# EAGLE board 4hp proto (EAGLE 9.2.2)
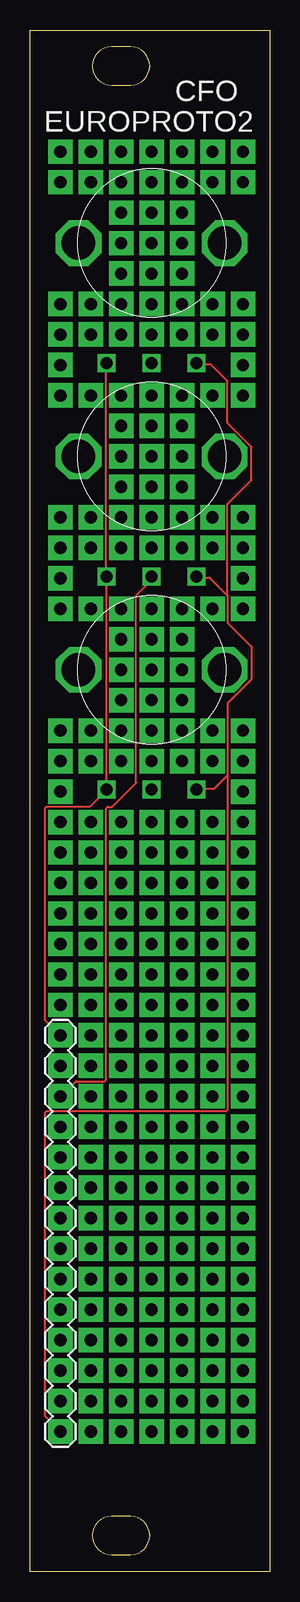
[diagram p0: board, top side]
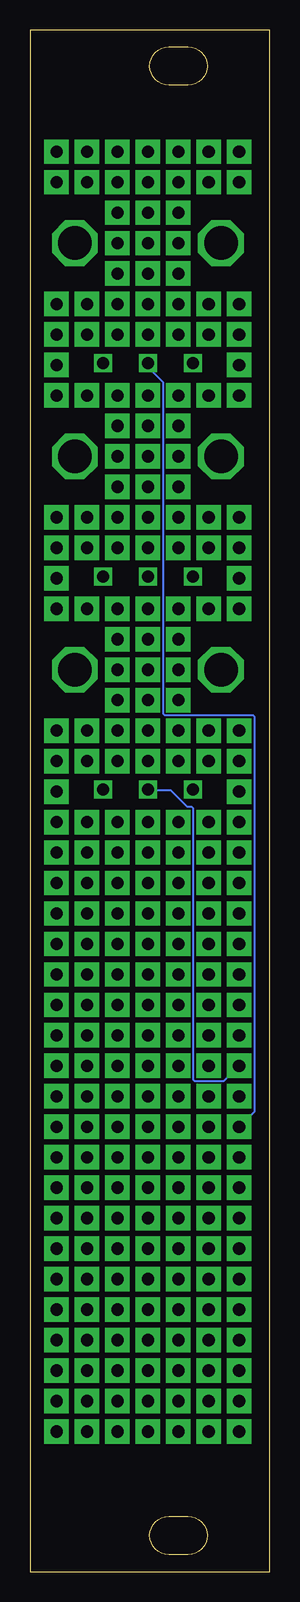
[diagram p1: board, bottom side, seen from below]

Size 20 x 128.5 mm. Coordinates in mm from the lower left corner, seen from the top.
Outline: 8.4,127.1 6.8,127.1 6.48,127.07 6.18,126.97 5.91,126.83 5.67,126.63 5.47,126.39 5.33,126.12 5.23,125.82 5.2,125.5 5.23,125.18 5.33,124.88 5.47,124.61 5.67,124.37 5.91,124.17 6.18,124.03 6.48,123.93 6.8,123.9 8.4,123.9 8.72,123.93 9.02,124.03 9.29,124.17 9.53,124.37 9.73,124.61 9.87,124.88 9.97,125.18 10,125.5 9.97,125.82 9.87,126.12 9.73,126.39 9.53,126.63 9.29,126.83 9.02,126.97 8.72,127.07 8.4,127.1
Outline: 8.4,4.6 6.8,4.6 6.48,4.57 6.18,4.47 5.91,4.33 5.67,4.13 5.47,3.89 5.33,3.62 5.23,3.32 5.2,3 5.23,2.68 5.33,2.38 5.47,2.11 5.67,1.87 5.91,1.67 6.18,1.53 6.48,1.43 6.8,1.4 8.4,1.4 8.72,1.43 9.02,1.53 9.29,1.67 9.53,1.87 9.73,2.11 9.87,2.38 9.97,2.68 10,3 9.97,3.32 9.87,3.62 9.73,3.89 9.53,4.13 9.29,4.33 9.02,4.47 8.72,4.57 8.4,4.6
Outline: 20,0 0,0 0,128.5 20,128.5 20,0
Copper layers (1*16): Top 0.035mm / dielectric 1.5mm / Bottom 0.035mm
Design rules "default": minimum track width 6mil, minimum drill 0.35mm, track to track 6mil, track to pad 6mil, pad to pad 6mil, via to via 6mil, smd to smd 6mil, copper to edge 40mil, drill to drill 6mil, minimum pad ring 10mil, minimum via ring 8mil, stop-mask expansion 4mil, vias tented up to drill 0mil, thermal gap 10mil

## Footprints (pad centres in the part's own frame; a part is rotated, then mirrored left to right if it is on the bottom)
1X14 = drill 1.016 pad 2.032 square: 1 0,0; 2 2.54,0; 3 5.08,0; 4 7.62,0; 5 10.16,0; 6 12.7,0; 7 15.24,0; 8 17.78,0; 9 20.32,0; 10 22.86,0; 11 25.4,0; 12 27.94,0; 13 30.48,0; 14 33.02,0
POT_V = drill 1 square: P1 -3.75,-10; P2 0,-10; P3 3.75,-10 | drill 1.016 pad 2.032 square: P$1 0,0; P$2 2.54,0; P$3 -2.54,0; P$4 -2.54,2.54; P$5 0,2.54; P$6 2.54,2.54; P$7 2.54,-2.54; P$8 0,-2.54; P$9 -2.54,-2.54; P$10 -2.54,5.08; P$11 0,5.08; P$12 2.54,5.08; P$13 5.08,5.08; P$14 7.62,5.08; P$15 -5.08,5.08; P$16 -7.62,5.08; P$26 -2.54,-7.62; P$27 0,-7.62; P$28 2.54,-7.62; P$29 5.08,-7.62; P$30 7.62,-7.62; P$31 -5.08,-7.62; P$32 -7.62,-7.62; P$33 -2.54,-5.08; P$34 0,-5.08; P$35 2.54,-5.08; P$36 5.08,-5.08; P$37 7.62,-5.08; P$38 -5.08,-5.08; P$39 -7.62,-5.08; P$40 -7.62,-10.16; P$41 7.62,-10.16 | drill 2.8 octagon: S1 -6.1,0; S2 6.1,0

## Placement (x,y rotation side)
J2  [1X14]  2.54,44.69 270 top
VR1  [POT_V]  10.16,75.17 0 top
VR2  [POT_V]  10.16,92.95 0 top
VR3  [POT_V]  10.16,110.73 0 top

## Library data of the parts
J2 VR1-VR3 = CFO

## Nets
5V: J2.14 VR1.P3 VR2.P3 VR3.P3
GND: J2.1 VR1.P1 VR2.P1 VR3.P1
POT1: J2.2 VR1.P2
POT2: J2.3 VR2.P2
POT3: J2.4 VR3.P2

## Tracks (layer width: path | path; a pad name or v marks a point on that pad's centre or on a via)
5V
  Top 0.152: 16.5,66.36 15.37,65.24 14,65.24 VR1.P3 | 16.5,66.36 16.5,72.36 18.5,74.36 18.5,77.11 16.5,79.11 16.5,81.36 | 16.5,81.36 15,82.86 14,82.86 VR2.P3 | 16.5,81.36 16.5,88.99 18.5,90.99 18.5,93.74 16.5,95.74 16.5,99.24 15.12,100.61 14,100.61 VR3.P3 | 16.5,66.36 16.5,38.49 16.37,38.36 1.37,38.36 1.25,38.24 1.25,12.99 2.5,11.74 J2.14
GND
  Top 0.152: VR3.P1 6.37,100.61 6.37,82.99 VR2.P1 6.37,82.86 6.37,65.24 VR1.P1 6.37,65.11 5,63.74 1.37,63.74 1.25,63.61 1.25,45.99 2.5,44.74 J2.1
N$1  (via drill 1.02 pad 2.03)
  other vias: 2.54,47.23
N$10  (via drill 1.02 pad 2.03)
  other vias: 2.54,118.35
N$12  (via drill 1.02 pad 2.03)
  other vias: 17.78,62.47
N$13  (via drill 1.02 pad 2.03)
  other vias: 15.24,62.47
N$14  (via drill 1.02 pad 2.03)
  other vias: 12.7,62.47
N$15  (via drill 1.02 pad 2.03)
  other vias: 10.16,62.47
N$16  (via drill 1.02 pad 2.03)
  other vias: 7.62,62.47
N$17  (via drill 1.02 pad 2.03)
  other vias: 5.08,62.47
N$18  (via drill 1.02 pad 2.03)
  other vias: 2.54,62.47
N$19  (via drill 1.02 pad 2.03)
  other vias: 2.54,59.93
N$20  (via drill 1.02 pad 2.03)
  other vias: 5.08,59.93
N$21  (via drill 1.02 pad 2.03)
  other vias: 7.62,59.93
N$22  (via drill 1.02 pad 2.03)
  other vias: 10.16,59.93
N$23  (via drill 1.02 pad 2.03)
  other vias: 12.7,59.93
N$24  (via drill 1.02 pad 2.03)
  other vias: 15.24,59.93
N$25  (via drill 1.02 pad 2.03)
  other vias: 17.78,59.93
N$27  (via drill 1.02 pad 2.03)
  other vias: 5.08,118.35
N$28  (via drill 1.02 pad 2.03)
  other vias: 7.62,118.35
N$30  (via drill 1.02 pad 2.03)
  other vias: 17.78,57.39
N$31  (via drill 1.02 pad 2.03)
  other vias: 15.24,57.39
N$32  (via drill 1.02 pad 2.03)
  other vias: 12.7,57.39
N$33  (via drill 1.02 pad 2.03)
  other vias: 10.16,57.39
N$34  (via drill 1.02 pad 2.03)
  other vias: 7.62,57.39
N$35  (via drill 1.02 pad 2.03)
  other vias: 5.08,57.39
N$36  (via drill 1.02 pad 2.03)
  other vias: 2.54,57.39
N$37  (via drill 1.02 pad 2.03)
  other vias: 2.54,54.85
N$38  (via drill 1.02 pad 2.03)
  other vias: 5.08,54.85
N$39  (via drill 1.02 pad 2.03)
  other vias: 7.62,54.85
N$40  (via drill 1.02 pad 2.03)
  other vias: 10.16,54.85
N$41  (via drill 1.02 pad 2.03)
  other vias: 12.7,54.85
N$42  (via drill 1.02 pad 2.03)
  other vias: 15.24,54.85
N$43  (via drill 1.02 pad 2.03)
  other vias: 17.78,54.85
N$48  (via drill 1.02 pad 2.03)
  other vias: 17.78,52.31
N$49  (via drill 1.02 pad 2.03)
  other vias: 15.24,52.31
N$50  (via drill 1.02 pad 2.03)
  other vias: 12.7,52.31
N$51  (via drill 1.02 pad 2.03)
  other vias: 10.16,52.31
N$52  (via drill 1.02 pad 2.03)
  other vias: 7.62,52.31
N$53  (via drill 1.02 pad 2.03)
  other vias: 5.08,52.31
N$54  (via drill 1.02 pad 2.03)
  other vias: 2.54,52.31
N$55  (via drill 1.02 pad 2.03)
  other vias: 2.54,49.77
N$56  (via drill 1.02 pad 2.03)
  other vias: 5.08,49.77
N$57  (via drill 1.02 pad 2.03)
  other vias: 5.08,47.23
N$58  (via drill 1.02 pad 2.03)
  other vias: 5.08,44.69
N$59  (via drill 1.02 pad 2.03)
  other vias: 5.08,42.15
N$60  (via drill 1.02 pad 2.03)
  other vias: 5.08,39.61
N$61  (via drill 1.02 pad 2.03)
  other vias: 5.08,37.07
N$62  (via drill 1.02 pad 2.03)
  other vias: 5.08,34.53
N$63  (via drill 1.02 pad 2.03)
  other vias: 5.08,31.99
N$64  (via drill 1.02 pad 2.03)
  other vias: 5.08,29.45
N$65  (via drill 1.02 pad 2.03)
  other vias: 5.08,26.91
N$66  (via drill 1.02 pad 2.03)
  other vias: 5.08,24.37
N$67  (via drill 1.02 pad 2.03)
  other vias: 5.08,21.83
N$68  (via drill 1.02 pad 2.03)
  other vias: 5.08,19.29
N$69  (via drill 1.02 pad 2.03)
  other vias: 5.08,16.75
N$70  (via drill 1.02 pad 2.03)
  other vias: 5.08,14.21
N$71  (via drill 1.02 pad 2.03)
  other vias: 7.62,14.21
N$72  (via drill 1.02 pad 2.03)
  other vias: 7.62,16.75
N$73  (via drill 1.02 pad 2.03)
  other vias: 7.62,19.29
N$74  (via drill 1.02 pad 2.03)
  other vias: 7.62,21.83
N$75  (via drill 1.02 pad 2.03)
  other vias: 7.62,24.37
N$76  (via drill 1.02 pad 2.03)
  other vias: 7.62,26.91
N$77  (via drill 1.02 pad 2.03)
  other vias: 7.62,29.45
N$78  (via drill 1.02 pad 2.03)
  other vias: 7.62,31.99
N$79  (via drill 1.02 pad 2.03)
  other vias: 7.62,34.53
N$80  (via drill 1.02 pad 2.03)
  other vias: 7.62,37.07
N$81  (via drill 1.02 pad 2.03)
  other vias: 7.62,39.61
N$82  (via drill 1.02 pad 2.03)
  other vias: 7.62,42.15
N$83  (via drill 1.02 pad 2.03)
  other vias: 7.62,44.69
N$84  (via drill 1.02 pad 2.03)
  other vias: 7.62,47.23
N$85  (via drill 1.02 pad 2.03)
  other vias: 7.62,49.77
N$86  (via drill 1.02 pad 2.03)
  other vias: 10.16,49.77
N$87  (via drill 1.02 pad 2.03)
  other vias: 10.16,47.23
N$88  (via drill 1.02 pad 2.03)
  other vias: 10.16,44.69
N$89  (via drill 1.02 pad 2.03)
  other vias: 10.16,42.15
N$90  (via drill 1.02 pad 2.03)
  other vias: 10.16,39.61
N$91  (via drill 1.02 pad 2.03)
  other vias: 10.16,37.07
N$92  (via drill 1.02 pad 2.03)
  other vias: 10.16,34.53
N$93  (via drill 1.02 pad 2.03)
  other vias: 10.16,31.99
N$94  (via drill 1.02 pad 2.03)
  other vias: 10.16,29.45
N$95  (via drill 1.02 pad 2.03)
  other vias: 10.16,26.91
N$96  (via drill 1.02 pad 2.03)
  other vias: 10.16,24.37
N$97  (via drill 1.02 pad 2.03)
  other vias: 10.16,21.83
N$98  (via drill 1.02 pad 2.03)
  other vias: 10.16,19.29
N$99  (via drill 1.02 pad 2.03)
  other vias: 10.16,16.75
N$100  (via drill 1.02 pad 2.03)
  other vias: 12.7,49.77
N$101  (via drill 1.02 pad 2.03)
  other vias: 15.24,49.77
N$102  (via drill 1.02 pad 2.03)
  other vias: 17.78,49.77
N$107  (via drill 1.02 pad 2.03)
  other vias: 17.78,47.23
N$108  (via drill 1.02 pad 2.03)
  other vias: 15.24,47.23
N$109  (via drill 1.02 pad 2.03)
  other vias: 12.7,47.23
N$110  (via drill 1.02 pad 2.03)
  other vias: 12.7,44.69
N$111  (via drill 1.02 pad 2.03)
  other vias: 15.24,44.69
N$112  (via drill 1.02 pad 2.03)
  other vias: 17.78,44.69
N$117  (via drill 1.02 pad 2.03)
  other vias: 17.78,42.15
N$118  (via drill 1.02 pad 2.03)
  other vias: 15.24,42.15
N$119  (via drill 1.02 pad 2.03)
  other vias: 12.7,42.15
N$120  (via drill 1.02 pad 2.03)
  other vias: 12.7,39.61
N$121  (via drill 1.02 pad 2.03)
  other vias: 15.24,39.61
N$122  (via drill 1.02 pad 2.03)
  other vias: 17.78,39.61
N$127  (via drill 1.02 pad 2.03)
  other vias: 17.78,37.07
N$128  (via drill 1.02 pad 2.03)
  other vias: 15.24,37.07
N$129  (via drill 1.02 pad 2.03)
  other vias: 12.7,37.07
N$130  (via drill 1.02 pad 2.03)
  other vias: 12.7,34.53
N$131  (via drill 1.02 pad 2.03)
  other vias: 15.24,34.53
N$132  (via drill 1.02 pad 2.03)
  other vias: 17.78,34.53
N$137  (via drill 1.02 pad 2.03)
  other vias: 17.78,31.99
N$138  (via drill 1.02 pad 2.03)
  other vias: 15.24,31.99
N$139  (via drill 1.02 pad 2.03)
  other vias: 12.7,31.99
N$140  (via drill 1.02 pad 2.03)
  other vias: 12.7,29.45
N$141  (via drill 1.02 pad 2.03)
  other vias: 15.24,29.45
N$142  (via drill 1.02 pad 2.03)
  other vias: 17.78,29.45
N$147  (via drill 1.02 pad 2.03)
  other vias: 17.78,26.91
N$148  (via drill 1.02 pad 2.03)
  other vias: 15.24,26.91
N$149  (via drill 1.02 pad 2.03)
  other vias: 12.7,26.91
N$150  (via drill 1.02 pad 2.03)
  other vias: 12.7,24.37
N$151  (via drill 1.02 pad 2.03)
  other vias: 15.24,24.37
N$152  (via drill 1.02 pad 2.03)
  other vias: 17.78,24.37
N$153  (via drill 1.02 pad 2.03)
  other vias: 12.7,21.83
N$154  (via drill 1.02 pad 2.03)
  other vias: 10.16,14.21
N$155  (via drill 1.02 pad 2.03)
  other vias: 12.7,14.21
N$156  (via drill 1.02 pad 2.03)
  other vias: 12.7,16.75
N$157  (via drill 1.02 pad 2.03)
  other vias: 12.7,19.29
N$158  (via drill 1.02 pad 2.03)
  other vias: 15.24,19.29
N$159  (via drill 1.02 pad 2.03)
  other vias: 15.24,21.83
N$160  (via drill 1.02 pad 2.03)
  other vias: 17.78,21.83
N$167  (via drill 1.02 pad 2.03)
  other vias: 17.78,19.29
N$168  (via drill 1.02 pad 2.03)
  other vias: 17.78,16.75
N$169  (via drill 1.02 pad 2.03)
  other vias: 15.24,16.75
N$170  (via drill 1.02 pad 2.03)
  other vias: 15.24,14.21
N$171  (via drill 1.02 pad 2.03)
  other vias: 17.78,14.21
N$178  (via drill 1.02 pad 2.03)
  other vias: 17.78,11.67
N$179  (via drill 1.02 pad 2.03)
  other vias: 15.24,11.67
N$180  (via drill 1.02 pad 2.03)
  other vias: 12.7,11.67
N$181  (via drill 1.02 pad 2.03)
  other vias: 10.16,11.67
N$182  (via drill 1.02 pad 2.03)
  other vias: 7.62,11.67
N$183  (via drill 1.02 pad 2.03)
  other vias: 5.08,11.67
N$184  (via drill 1.02 pad 2.03)
  other vias: 10.16,118.35
N$187  (via drill 1.02 pad 2.03)
  other vias: 12.7,118.35
N$188  (via drill 1.02 pad 2.03)
  other vias: 15.24,118.35
N$189  (via drill 1.02 pad 2.03)
  other vias: 17.78,118.35
POT1
  Bottom 0.152: VR1.P2 10.12,65.11 8.25,65.11 6.87,63.74 6.5,63.74 6.37,63.61 6.37,40.99 6.25,40.86 3.87,40.86 2.62,42.11 J2.2
POT2
  Top 0.152: VR2.P2 10.12,82.86 10.12,82.61 8.87,81.36 8.87,65.74 6.87,63.74 6.5,63.74 6.37,63.61 6.37,40.99 6.25,40.86 3.87,40.86 2.62,39.61 J2.3
POT3
  Bottom 0.152: VR3.P2 10.12,100.61 10.12,100.36 8.87,99.11 8.87,71.49 8.75,71.36 1.37,71.36 1.25,71.24 1.25,38.36 2.5,37.11 J2.4

## Text on the board
tNames: CFO | EUROPROTO2